# Altium PCB CDH.PcbDoc
Units mil, origin at the board's own origin, x right, y up, seen from the top; angles counter-clockwise.
Board outline 3145 x 3115 mil, 2 copper layers (Top Layer, Bottom Layer); 28 components, 26 nets, 131 pads, 2 vias.
Unrouted connection lines stored in the file: 69.
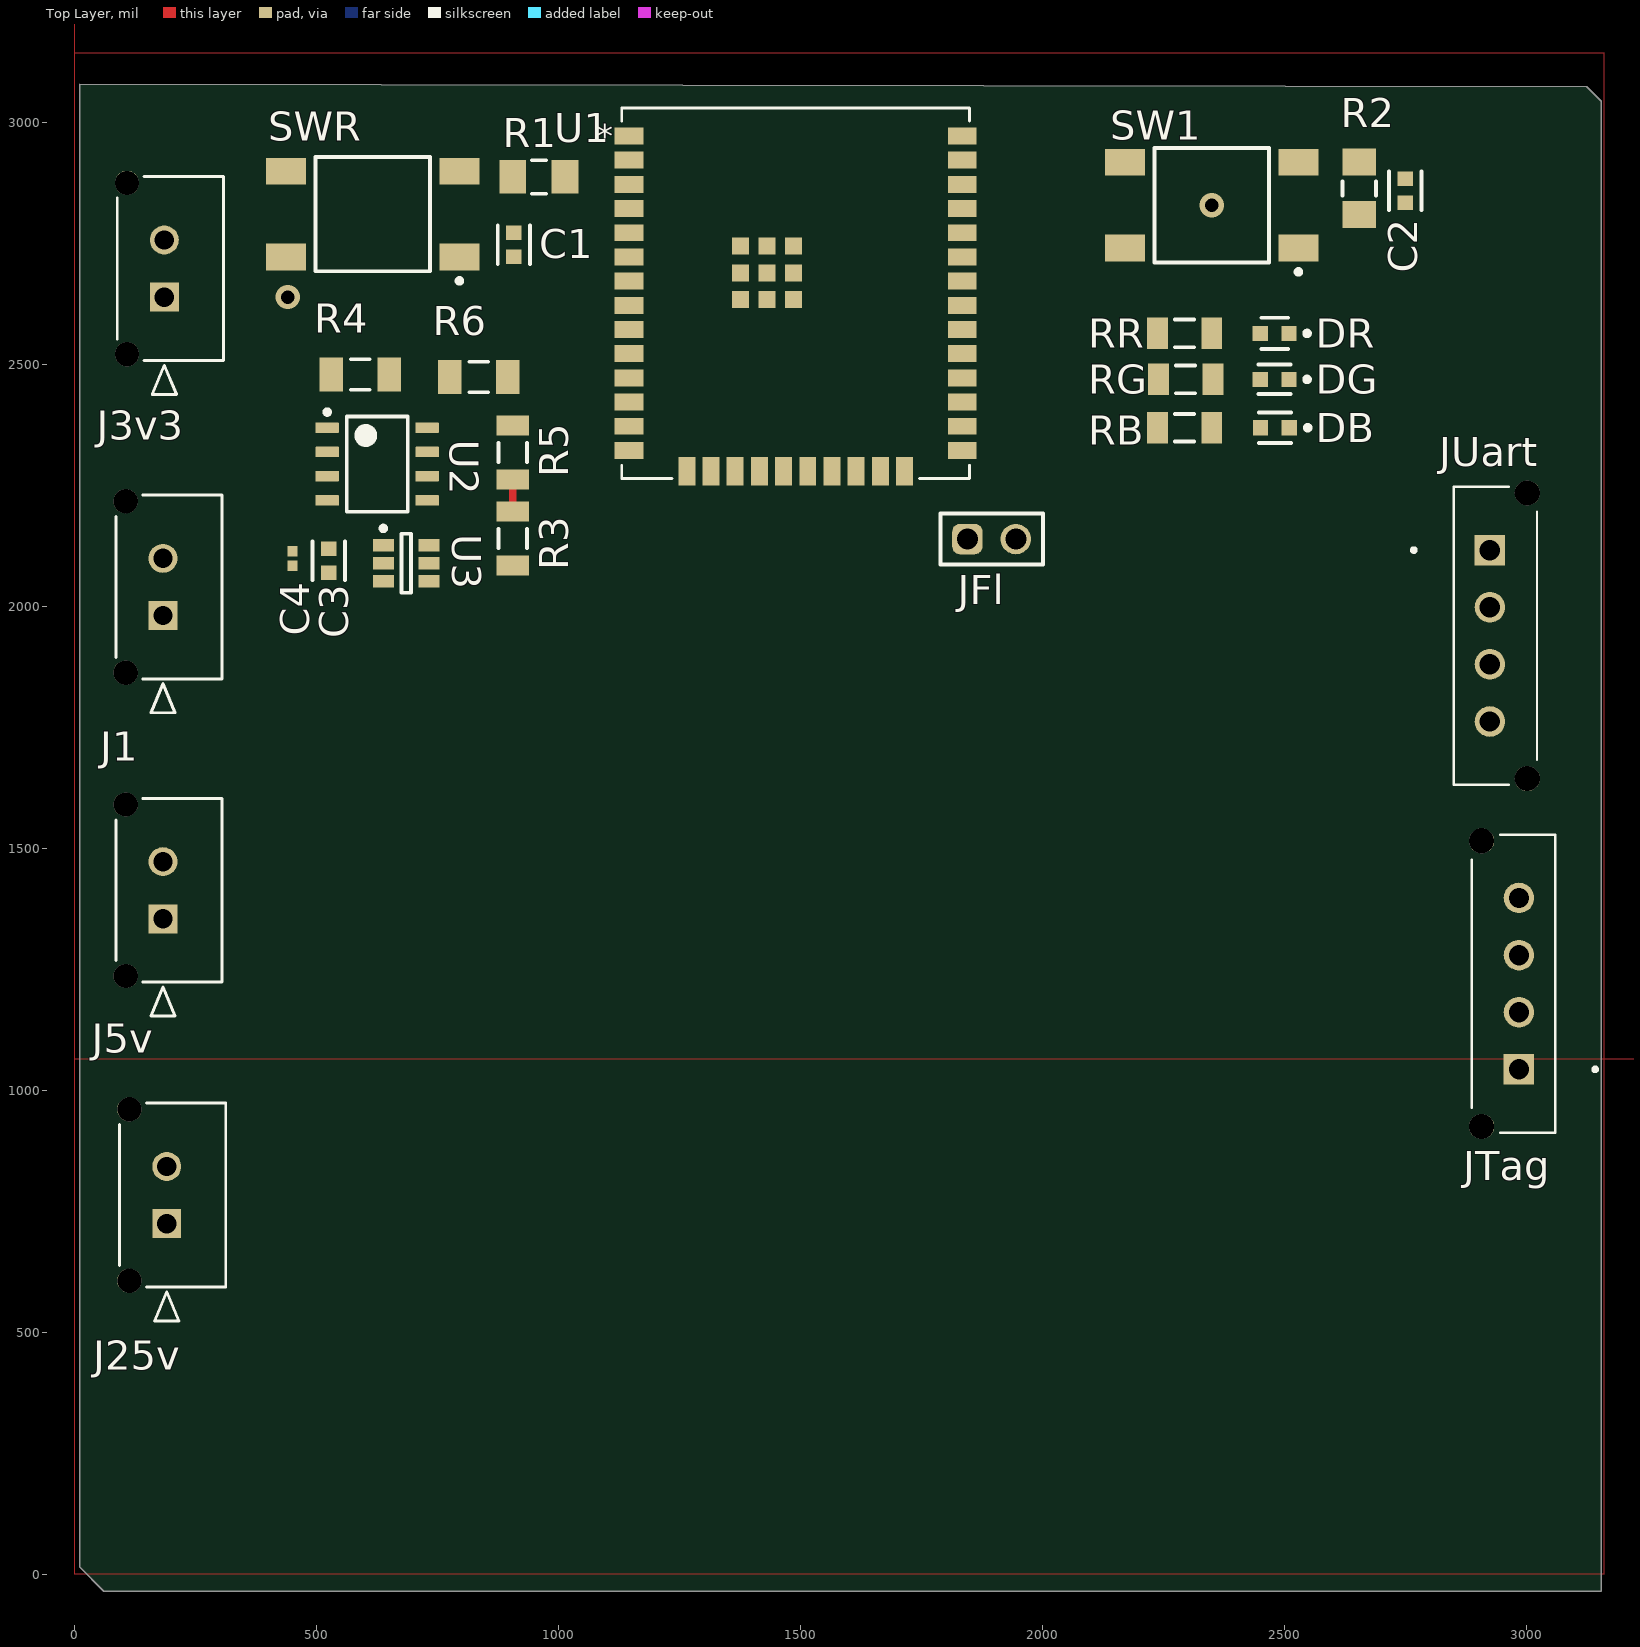
[diagram p0: Top Layer view]
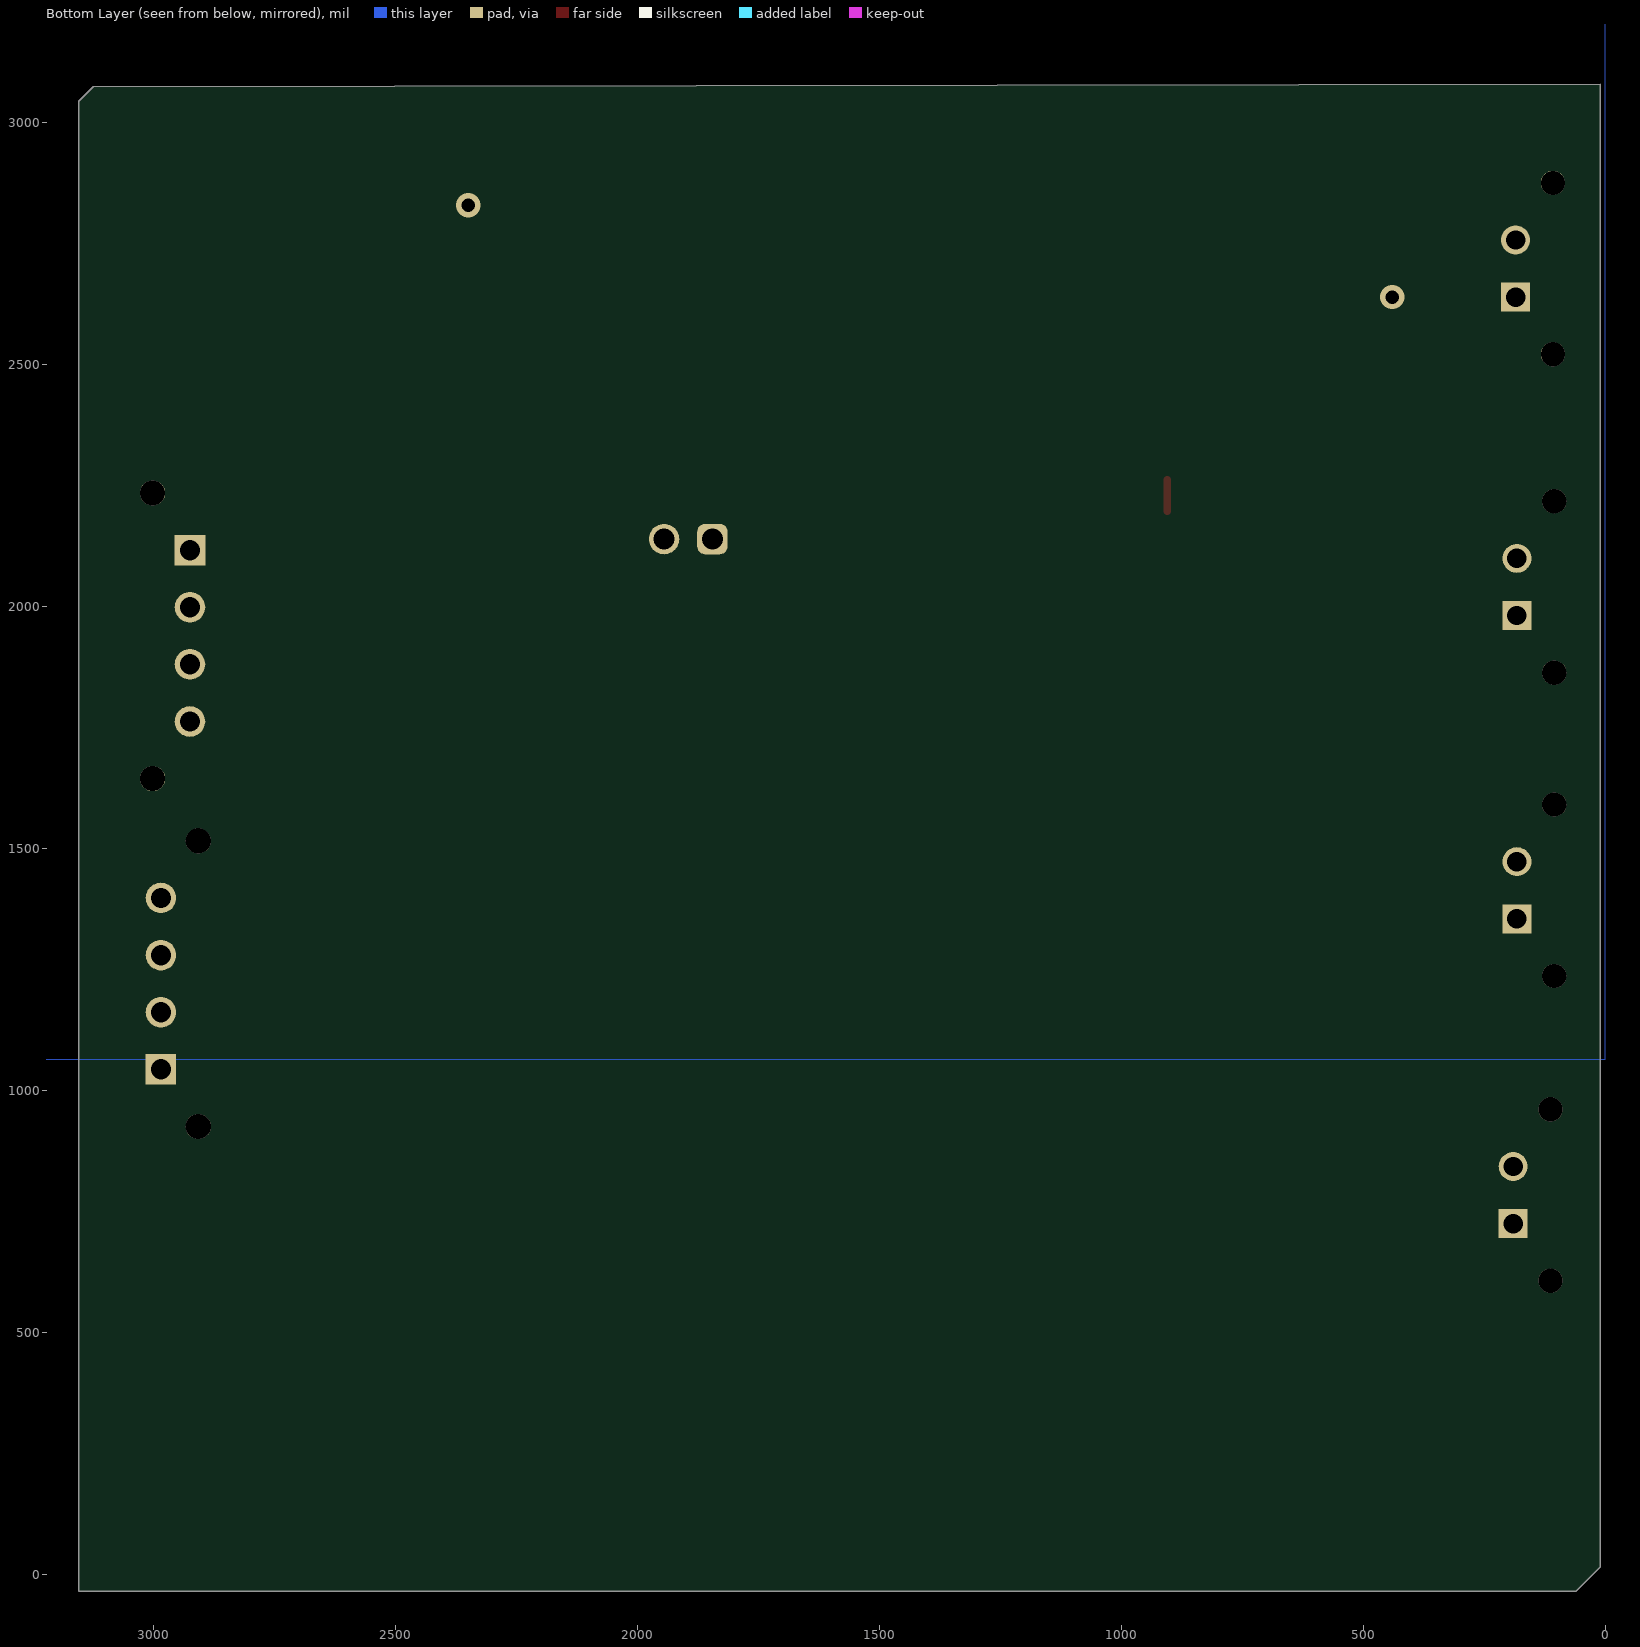
[diagram p1: Bottom Layer view, seen from below]

## Layer stack, top to bottom
Top Solder: solder mask 0.4, Solder Resist, Dk 3.5
Top Layer: signal copper 1.4
Dielectric 1: dielectric 12.6, FR-4, Dk 4.8
Bottom Layer: signal copper 1.4
Bottom Solder: solder mask 0.4, Solder Resist, Dk 3.5

## Board outline
10,3080 10,15 60,-35 3155,-35 3155,3045 3125,3075

## Design rules (kind name [scope] priority, off if disabled: settings)
BoardOutlineClearance [All] p1: gap=7.87 ignorepadtopadclearanceinfootprint=FALSE except(15.75: Arc-SplitBarrior Arc-SplitContinuation Track-SplitBarrior Track-SplitContinuation SMDPad-SplitBarrior SMDPad-SplitContinuation THPad-SplitBarrior THPad-SplitContinuation Via-SplitBarrior Via-SplitContinuation Fill-SplitBarrior Fill-SplitContinuation Poly-SplitBarrior Poly-SplitContinuation Region-SplitBarrior Region-SplitContinuation Text-SplitBarrior Text-SplitContinuation)
Clearance "Clearance Bottom Layer" [OnLayer('Bottom Layer')] p1: gap=8 ignorepadtopadclearanceinfootprint=TRUE except(10: Arc-Text Track-Text SMDPad-Text THPad-Text Via-Text Fill-Text Poly-Text Region-Text Text-Text)
Clearance "Clearance Top Layer" [OnLayer('Top Layer')] p2: gap=8 ignorepadtopadclearanceinfootprint=TRUE except(10: Arc-Text Track-Text SMDPad-Text THPad-Text Via-Text Fill-Text Poly-Text Region-Text Text-Text)
Clearance [All] p3: gap=7.87 ignorepadtopadclearanceinfootprint=FALSE except(3.5: Arc-Arc Arc-Track Arc-SMDPad Track-Track Track-SMDPad SMDPad-SMDPad; 5: Arc-Via Track-Via SMDPad-Via THPad-Via Via-Via; 10: Arc-Text Track-Text SMDPad-Text THPad-Text Via-Text Fill-Text Poly-Text Region-Text Text-Text)
HoleSize [All] p1: absolutevalues=TRUE maxlimit=248.03 minlimit=7.87 maxpercent=80.000 minpercent=20.000
MinimumAnnularRing [All] p1: minimumring=3
MinimumSolderMaskSliver [All] p1: minsoldermaskwidth=3.94
PolygonConnect PolygonConnect_1 [All] p1: thpad.connectstyle=Relief thpad.reliefconductorwidth=20 thpad.reliefentries=4 thpad.polygonreliefangle="90 Angle" thpad.airgapwidth=10 smdpad.connectstyle=Relief smdpad.reliefconductorwidth=20 smdpad.reliefentries=4 smdpad.polygonreliefangle="90 Angle" smdpad.airgapwidth=10 via.connectstyle=Direct via.reliefconductorwidth=20 via.reliefentries=4 via.polygonreliefangle="90 Angle" via.airgapwidth=10
RoomDefinition MAPLE_CDH_Periph [InComponentClass('MAPLE_CDH_Periph')] p1: confinementstyle=ConfineIn formatcopy=TRUE lockcomponents=FALSE outline -325,-1855 1675,-1855 1675,-855 -325,-855
RoomDefinition MAPLE_CDH_Cntrlr [InComponentClass('MAPLE_CDH_Cntrlr')] p2: confinementstyle=ConfineIn formatcopy=TRUE lockcomponents=FALSE outline -325,-1855 1675,-1855 1675,-855 -325,-855
RoutingCorners [All] p1: cornerstyle=Round minsetback=100 maxsetback=100
RoutingVias [All] p1: holewidth=19.68 width=39.37 viastyle="Through Hole" minholewidth=7.87 minwidth=17.72 maxholewidth=39.37 maxwidth=78.74
SilkToSilkClearance [All] p1: silktosilkclearance=3.94
SilkToSolderMaskClearance [IsPad] p1: minsilkscreentomaskgap=3.94 clearancetoexposedcopper=TRUE
SolderMaskExpansion [All] p1: expansion=4 istentingtop=FALSE
Width [All] p1: maxlimit=100 minlimit=3.5 preferedwidth=15
25 further rules are at their usual default settings.

## Classes and differential pairs
component class MAPLE_CDH_Cntrlr: U1

## Components (designator, comment, footprint, x,y, rotation, side; value= is the part's Value field where it differs from the comment)
C1 "CL10A105KA8NNNC" FP-CL10-IPC_C 907.67,2748.39 r90 top
C2 "CL10A105KA8NNNC" FP-CL10-IPC_C 2750,2860 r90 top
C3 "CL10A105KA8NNNC" FP-CL10-IPC_C 525,2095 r270 top
C4 "CL03A104KQ3NNNC" CAPC0603X33X15ML03T05 450,2100 r90 top
DB "LTST-C193TBKT-5A" FP-LTST-C193TBKT-5A-MFG 2480.47,2370 r180 top
DG "LTST-C193KGKT-5A" FP-LTST-C193KGKT-5A-MFG 2480,2470 r180 top
DR "LTST-C193KRKT-5A" FP-LTST-C193KRKT-5A-MFG 2480,2565 r180 top
J1 "436500227" CON_436500227_MOL 182.26,1981.89 r270 top
J3v3 "436500227" CON_436500227_MOL 185,2640 r270 top
J5v "436500227" CON_436500227_MOL 182.26,1355 r270 top
J25v "436500227" CON_436500227_MOL 190,725 r270 top
JFl "61300211121" 61300211121 1895,2140 r0 top
JTag "0436500415" MOLEX_0436500415 2985,1220.94 r270 top
JUart "0436500415" MOLEX_0436500415 2925,1940 r90 top
R1 "RMCF1206FT10K0" FP-RMCF1206-IPC_B 959.16,2888.49 r180 top
R2 "RMCF1206FT10K0" FP-RMCF1206-IPC_B 2655,2865 r90 top
R3 "" RESC3116X65X40NL10T20 905,2141.1 r90 top
R4 "" RESC3116X65X40ML10T20 589.96,2480 r180 top
R5 "RC1206FR-0724K9L" RESC3116X65X40NL10T20 905,2318.9 r270 top
R6 "RC1206FR-07100KL" RESC3116X65X40ML10T20 835,2475 r0 top
RB "ERJ-8ENF1000V" RESC3216X70X50NL05T20 2293.9,2370 r0 top
RG "ERJ-8GEYJ271V" RESC3216X70X50NL05T20 2296.1,2470 r0 top
RR "ERJ-8GEYJ271V" RESC3216X70X50NL05T20 2293.9,2565 r0 top
SW1 "FSM4JSMA" TECO-FSM4JSMA_V 2350,2830 r270 top
SWR "FSM4JSMA" TECO-FSM4JSMA_V 615.87,2811.42 r270 top
U1 "ESP32-WROOM-32UE-N16" ESP32-32UE_EXP 1490,2648.11 r0 top
U2 "THS4505DR" D0008A_L 625,2295 r0 top
U3 "ADC121C027CIMK" MK06A_N 685,2090 r0 top

## Footprints (in the part's own frame and the unit in brackets; to place one, negate y for a bottom-side part, rotate by r counter-clockwise, add the part's x,y. Pads: shape width x height; smd on the part's side, far side on the other; paste and mask are expansions set on the pad)
61300211121 [mm] "Pin Header, pitch 2.54 mm, THT, Vertical, single row, 2p"
  rrect50% 1.6x1.6 hole 1.1: 1(-1.27,0)
  round 1.6 hole 1.1: 2(1.27,0)
  silkscreen extent -2.69,-1.35 2.69,1.35, body extent -2.54,-1.27 2.54,1.27, height 8.57
CAPC0603X33X15ML03T05 [mm] "Chip Capacitor, 2-Leads, Body 0.60x0.30mm, IPC Low Density"
  rect 0.56x0.52 smd: 1(-0.38,0) 2(0.38,0)
  body extent -0.31,-0.17 0.32,0.16, height 0.33
CON_436500227_MOL [mm]
  rect 1.52x1.52 / inner round 1.524 / far side rect 1.52x1.52 hole 1.02 paste-0.76 mask+0.076: 1(0,0)
  round 1.52 / inner round 1.524 / far side round 1.52 hole 1.02 paste-0.76 mask+0.076: 2(-3,0)
  round 1.27 / inner round 1.524 / far side round 1.27 hole 1.27 unplated paste-0.635 mask+0.076: M1(3,-1.96) M2(-6,-1.96)
  silkscreen extent -6.32,-2.47 5.1,3.1
D0008A_L [mm] "SOIC, 8-Leads, Body 5x4mm, Pitch 1.27mm, IPC High Density"
  rrect18% 1.25x0.55 smd: 1(-2.625,1.905) 2(-2.625,0.635) 3(-2.625,-0.635) 4(-2.625,-1.905) 5(2.625,-1.905) 6(2.625,-0.635) 7(2.625,0.635) 8(2.625,1.905)
  silkscreen extent -2.75,-2.5 1.6,2.85, body extent -3,-2.45 3,2.45, height 1.63
ESP32-32UE_EXP [mil]
  rect 59x35 smd paste+0 mask+0: 1(-344.49,325) 2(-344.49,275) 3(-344.49,225) 4(-344.49,175) 5(-344.49,125) 6(-344.49,75) 7(-344.49,25) 8(-344.49,-25) 9(-344.49,-75) 10(-344.49,-125) 11(-344.49,-175) 12(-344.49,-225) 13(-344.49,-275) 14(-344.49,-325) 25(344.49,-325) 26(344.49,-275) 27(344.49,-225) 28(344.49,-175) 29(344.49,-125) 30(344.49,-75) 31(344.49,-25) 32(344.49,25) 33(344.49,75) 34(344.49,125) 35(344.49,175) 36(344.49,225) 37(344.49,275) 38(344.49,325)
  rect 35x59 smd paste+0 mask+0: 15(-225,-368.11) 16(-175,-368.11) 17(-125,-368.11) 18(-75,-368.11) 19(-25,-368.11) 20(25,-368.11) 21(75,-368.11) 22(125,-368.11) 23(175,-368.11) 24(225,-368.11)
  rect 35x35 smd paste-17.5 mask-17.5: 39(-59.22,42.08) 40(-114.34,97.2) 41(-114.34,42.08) 42(-114.34,-13.04) 43(-59.22,-13.04) 44(-59.22,97.2) 45(-4.11,97.2) 46(-4.11,42.08) 47(-4.11,-13.04)
  silkscreen extent -360,-383 360,383
FP-CL10-IPC_C [mil]
  rect 29.85x31.97 smd paste+0 mask+0: 1(-24.68,0) 2(24.68,0)
  silkscreen extent -40,-33 40,33, body extent -44,-22 44,22, height 10
FP-LTST-C193KGKT-5A-MFG [mm]
  rect 0.8x0.8 smd paste+0 mask+0: 1(-0.75,0) 2(0.75,0)
  silkscreen extent -1.83,-0.77 0.85,0.77, body extent -1.25,-0.55 1.25,0.55, height 0.25
FP-LTST-C193KRKT-5A-MFG [mm]
  rect 0.8x0.8 smd paste+0 mask+0: 1(-0.75,0) 2(0.75,0)
  silkscreen extent -1.83,-0.82 0.7,0.82, body extent -1.25,-0.55 1.25,0.55, height 0.25
FP-LTST-C193TBKT-5A-MFG [mm]
  rect 0.8x0.8 smd paste+0 mask+0: 1(-0.75,0) 2(0.75,0)
  silkscreen extent -1.85,-0.8 0.85,0.8, body extent -1.25,-0.55 1.25,0.55, height 0.25
FP-RMCF1206-IPC_B [mil]
  rect 55.27x69.22 smd paste+0 mask+0: 1(-54.16,0) 2(54.16,0)
  silkscreen extent -15,-35 15,35, body extent -92,-44 92,44, height 10
MK06A_N [mm] "SOT23, 6-Leads, Body 3.0x1.7mm, Pitch 0.95mm, Lead Span 2.9mm, IPC Medium Density"
  rect 1.1x0.65 smd: 1(-1.2,0.95) 2(-1.2,0) 3(-1.2,-0.95) 4(1.2,-0.95) 5(1.2,0) 6(1.2,0.95)
  silkscreen extent -1.32,-1.55 0.25,1.95, body extent -0.87,-1.53 0.87,1.54, height 1
MOLEX_0436500415 [mm]
  rect 1.605x1.605 hole 1.07: 1(4.5,0)
  round 1.605 hole 1.07: 2(1.5,0) 3(-1.5,0) 4(-4.5,0)
  round 1.32 hole 1.32 unplated: ""(-7.5,-1.96) ""(7.5,-1.96)
  silkscreen extent -7.83,-2.47 7.83,4.1
RESC3116X65X40ML10T20 [mm] "Chip Resistor, 2-Leads, Body 3.10x1.60mm, IPC Low Density"
  rect 1.25x1.8 smd: 1(-1.525,0) 2(1.525,0)
  silkscreen extent -0.5,-0.8 0.5,0.8, body extent -1.6,-0.85 1.6,0.85, height 0.65
RESC3116X65X40NL10T20 [mm] "Chip Resistor, 2-Leads, Body 3.10x1.60mm, IPC Medium Density"
  rect 1.05x1.7 smd: 1(-1.425,0) 2(1.425,0)
  silkscreen extent -0.5,-0.75 0.5,0.75, body extent -1.6,-0.85 1.6,0.85, height 0.65
RESC3216X70X50NL05T20 [mm] "Chip Resistor, 2-Leads, Body 3.20x1.60mm, IPC Medium Density"
  rect 1.1x1.65 smd: 1(-1.425,0) 2(1.425,0)
  silkscreen extent -0.5,-0.72 0.5,0.72, body extent -1.63,-0.82 1.62,0.82, height 0.7
TECO-FSM4JSMA_V [mm] "SMD, 4-Leads, Body 6x6mm, Pitch 4.5mm"
  rect 1.4x2.1 smd: 1(2.25,4.55) 2(2.25,-4.55) 3(-2.25,4.55) 4(-2.25,-4.55)
  silkscreen extent -3,-3 3.62,4.68, body extent -3,-5 3,5, height 5.08

## Part data
C1 C2 C3: library part CMP-13271-004127-1, "Cap Ceramic 1uF 25V X5R ±10% Pad SMD 0603 +85°C T/R", Capacitance=1uF, Case Code (Imperial)=0603, Case Code (Metric)=1608, Dielectric=X5R, Max Operating Temperature=85°C, Min Operating Temperature=-55°C, Package Quantity=1, Tolerance=10%, Voltage=25V, Case/Package=0603, Contact Plating=Tin, Depth=0.8mm, Height=0.8mm, Lead Free="Lead Free", Length=1.6mm, Material=Ceramic, Mount="Surface Mount", Packaging="Tape and Reel", Radiation Hardening=No, Thickness=0.035inch, Voltage Rating=25V, Voltage Rating (DC)=25V, Width=0.031inch
C4: library part CMP-2010-00674-1, Manufacturer=Samsung, Part Number=CL03A104KQ3NNNC
DB: library part CMP-2000-06624-2, "LED BLUE CLEAR CHIP SMD", Case Code (Imperial)=0603, Case Code (Metric)=1608, Color=Blue, Forward Current=20mA, Forward Voltage=2.8V, Lens Color=Colorless, Max Operating Temperature=80°C, Min Operating Temperature=-20°C, Package Quantity=1, Power Dissipation=76mW, Reverse Voltage=5V, Test Current=5mA, Case/Package=0603, Depth=0.8mm, Dominant Wavelength=475nm, Height=0.35mm, Illumination Color=Blue, Lead Free="Lead Free", Length=1.6mm, Lens Style=Diffused, Lens Transparency=Clear, Luminous Intensity=15mcd, Mount="Surface Mount", Number of Elements=1, Number of LEDs=1, Number of Pins=2, Packaging="Tape and Reel", Radiation Hardening=No, RoHS Compliant=Yes, Viewing Angle=130°, Width=0.8mm
DG: library part CMP-2000-06622-2, "LED GREEN CLEAR CHIP SMD", Case Code (Imperial)=0603, Case Code (Metric)=1608, Color=Green, Forward Current=30mA, Forward Voltage=2.3V, Lens Color=Colorless, Max Operating Temperature=85°C, Min Operating Temperature=-55°C, Package Quantity=3000, Power Dissipation=75mW, Reverse Voltage=5V, Test Current=5mA, Case/Package=0603, Depth=0.8mm, Dominant Wavelength=576.5nm, Height=0.35mm, Illumination Color=Green, Lead Free="Lead Free", Length=1.6mm, Lens Style=Diffused, Lens Transparency=Clear, Luminous Intensity=28mcd, Mount="Surface Mount", Number of Elements=1, Number of LEDs=1, Number of Pins=2, Packaging="Tape and Reel", Power Rating=75mW, Radiation Hardening=No, Viewing Angle=130°, Width=0.8mm
DR: library part CMP-2000-06623-2, "LED RED CLEAR CHIP SMD", Case Code (Imperial)=0603, Case Code (Metric)=1608, Color=Red, Forward Current=5mA, Forward Voltage=2.3V, Lens Color=Colorless, Max Operating Temperature=85°C, Min Operating Temperature=-55°C, Package Quantity=3000, Power Dissipation=50mW, Reverse Voltage=5V, Case/Package=0603, Depth=0.8mm, Dominant Wavelength=631nm, Height=0.35mm, Illumination Color=Red, Lead Free="Lead Free", Length=1.6mm, Lens Style=Diffused, Lens Transparency=Clear, Luminous Intensity=45mcd, Mount="Surface Mount", Number of Elements=1, Number of LEDs=1, Number of Pins=2, Packaging="Tape and Reel", Radiation Hardening=No, Test Current=5mA, Viewing Angle=130°, Width=0.8mm
J1 J3v3 J5v J25v: "No Description Available", Mfr_Name="Molex Connector Corporation", Copyright="Copyright (C) 2023 Ultra Librarian. All rights reserved.", Digi-Key_Part_Number_1=WM10656-ND, Manufacturer_Part_Number=436500227, RefDes=RefDes, Type=DEV
JFl: library part CMP-1712-00002-5, Color=Black, Contact Resistance=20mΩ, Current Rating=3A, Max Operating Temperature=125°C, Min Operating Temperature=-40°C, Operating Supply Voltage=250V, Connector Type="Male Pin", Contact Gender=Male, Contact Material=Copper, Contact Mating Length=5.9944mm, Contact Plating=Gold, Gender=Male, Height=8.94mm, Housing Material=PBT, Lead Free="Lead Free", Lead Pitch=2.54mm, Mount="Through Hole", NexarPartId=20081794, Number Of Contacts=2, Number of Pins=2, Number of Positions=2, Number Of Rows=1, Orientation=Vertical, Packaging=Bulk, Pitch=2.54mm, REACH SVHC="No SVHC", RoHS=Compliant, Termination="Through Hole", Voltage Rating=250V
JTag JUart: "Connector Header Through Hole 4 position 0.118 (3.00mm)", Package=None, Availability=Unavailable, MF=Molex, MP=0436500415, Price=None, SnapEDA_Link=https://www.snapeda.com/parts/0436500415/Molex/view-part/425083/?ref=snap
R1 R2: library part CMP-26527-000151-1, "10kΩ ±1% 0.25W 1206 Thick Film Chip Resistor AEC-Q200 compliant", Case Code (Imperial)=1206, Case Code (Metric)=3216, Max Operating Temperature=155°C, Max Power Dissipation=250mW, Min Operating Temperature=-55°C, Resistance=10kR, Resistor Type="Thick Film", Temperature Coefficient=100ppm/°C, Tolerance=1%, Case/Package=1206, Construction=Rectangular, Contact Plating=Tin, Depth=1.6mm, Features="Automotive AEC-Q200", Height=0.028inch, Lead Free="Lead Free", Length=3.2mm, Military Standard=Not, Mount="Surface Mount", Number of Terminations=2, Packaging="Tape and Reel", Power Rating=250mW, Radiation Hardening=No, RoHS Compliant=Yes, Series=RMCF, Size Code=1206, Width=0.063inch
R3: library part CMP-2003-03636-1, Manufacturer=Yageo, Part Number=RC1206FR-0724K9L
R4 R6: library part CMP-2100-03674-1, "Chip Resistor, 100 KOhm, +/- 1%, 0.25 W, -55 to 155 degC, 1206 (3216 Metric), RoHS, Tape and Reel", Case Code (Imperial)=1206, Case Code (Metric)=3216, Manufacturer=Yageo, Max Operating Temperature=155degC, Min Operating Temperature=-55degC, Package Description="2-Pin Surface Mount Device, Body 3.1 x 1.6 mm", Package Reference=1206.0, Power Rating=250mW, Resistance=100KOhm, Temperature Coefficient=100ppm/degreesC, Tolerance=1%, Voltage Rating=200V, Case/Package=1206, Composition=ThickFilm, Datasheet URL=http://www.yageo.com/NewPortal/yageodocoutput?fileName=/pdf/R-Chip/PYu-RC_Group_51_RoHS_L_5.pdf, Datasheet Version="Rev. 5, 10/2016", Depth=1.6mm, Height=0.55mm, Lead Free=LeadFree, Length=3.1mm, Manufacturer URL=http://www.yageo.com/, Packaging=TapeandReel, REACH SVHC=NoSVHC, RoHSCompliant=true, Termination=SMD/SMT
R5: library part CMP-2003-03636-1, Manufacturer=Yageo, Part Number=RC1206FR-0724K9L
RB: library part CMP-2003-00016-1, Manufacturer=Panasonic, Part Number=ERJ-8ENF1000V
RG RR: library part CMP-2003-00597-1, Manufacturer=Panasonic, Part Number=ERJ-8GEYJ271V
SW1 SWR: library part CMP-2000-05602-2, "Swicth, SPST, 24 V, -35 to 85 degC, 4-Pin SMD, RoHS, Tape and Reel", Case\/Package=SMD/SMT, Contact Current Rating=50mA, Contact Resistance=100mOhm, Manufacturer="TE Connectivity", Max Operating Temperature=85degC, Max Voltage Rating (DC)=12V, Min Operating Temperature=-35degC, Operating Force=1.57N, Package Description="4-Pin Surface Mount Device, Body 6 x 6 mm, Pitch 4.5 mm", Package Quantity=750, Voltage Rating=24V, Actuator Length=0.055inch, Actuator Material=Polyamide, Contact Material=CopperAlloy, Contact Plating=Silver, Current Rating=50mA, Datasheet URL=http://www.te.com/commerce/DocumentDelivery/DDEController?Action=showdoc&DocId=Customer+Drawing%7F2-1437565-7%7FV%7Fpdf%7FEnglish%7FENG_CD_2-1437565-7_V.pdf%7F4-1437565-2, Datasheet Version="Rev. V, 02/2015", Electrical Life=100000Cycles, Illumination Type=Illuminated, Length=6mm, Manufacturer URL=http://www.te.com/, Mechanical Life=100000Cycles, Mount=SurfaceMount, Mounting Technology=SurfaceMount, Orientation=Straight, Package Reference=FSM4JSMA, Packaging=LoosePiece, REACH SVHC=Unknown, RoHSCompliant=true, Switch Travel=0.25mm, Termination=GullWing, Throw Configuration=SPST, Voltage Rating (DC)=24V, Width=6mm
U1: "No Description Available", Mfr_Name="Espressif Systems", Copyright="Copyright (C) 2023 Ultra Librarian. All rights reserved.", Manufacturer_Part_Number=ESP32-WROOM-32UE-N16, RefDes=RefDes, Type=DEV
U2: library part CMP-0811-00031-2, "Wideband, Low-Distortion Fully Differential Amplifier, 4.5 to 15 V, -40 to 85 degC, 8-pin SOIC (D8), Green (RoHS & no Sb/Br)", Manufacturer="Texas Instruments", Offset Voltage Drift (+/-)(Max)(uV/Degrees Celsius=10, 2nd Harmonic(dBc)=66, 3rd Harmonic(dBc)=65, @ MHz=30, BW @ Acl(MHz)=260, Code_JEDEC=MS-012, ComponentLink1Description="Manufacturer URL", ComponentLink1URL=http://www.ti.com/, ComponentLink2Description=Datasheet, ComponentLink2URL=http://www.ti.com/general/docs/lit/getliterature.tsp?genericPartNumber=THS4505&fileType=pdf, ComponentLink3Description="Package Specification", ComponentLink3URL=http://www.ti.com/litv/pdf/msoi002j, DatasheetVersion=SLOS363D, Eco-Plan="Green (RoHS & no Sb/Br)", Io(Typ)(mA)=100, Iq per channel(Max)(mA)=21, Mounting Technology="Surface Mount", Number of Channels=1, PackageDescription="8-Pin Plastic Small Outline, Body 4.9 x 3.9 mm, Pitch 1.27 mm", PackageReference=D0008A, PackageVersion="4040047-3/M, 06/2011", PartNumber=THS4505DR, Settling Time (0.1%)(Typ)(ns)=20, Slew Rate(Typ)(V/us)=1800, SubFamily="Fully Differential Amplifier", THD (Fc is 1 MHz)(Typ)(dB)=-78, Vio(Max)(mV)=-7, Vn at Flatband(Typ)(nV/rtHz)=8, Vs(Max)(V)=15, Vs(Min)(V)=4.5
U3: library part CMP-0054-00264-2, "I2C-Compatible, 12-Bit Analog-to-Digital Converter with Alert Function, 6-pin Tiny SOT23", Manufacturer="National Semiconductor", PackageTopMarking=X31C*XTT, PowerWise=Y, Code_IPC=SOT26A-6, Code_JEDEC=MO-193-AA, ComponentLink1Description="ADC121C027 Datasheet", ComponentLink1URL=http://www.national.com/ds/AD/ADC121C027.pdf, ComponentLink2Description="ADC121C027 Web Page", ComponentLink2URL=http://www.national.com/pf/AD/ADC121C027.html, ComponentLink3Description="MK06A Package Page", ComponentLink3URL=http://www.national.com/packaging/folders/mk06a.html, CompType="ADC IC", DatasheetVersion=Apr-2009, PackageDescription="Molded TSOT, 2.97 x 1.65 x 0.87mm Body, 6 Lead, 0.95mm Pitch", PackageReference=MK06A, PackageVersion="revE, Nov-2008", PinCount=6, RevisionNote="Component URLs added", RoHS=N

## Via types
v1: diameter 50, hole 28, Top Layer to Bottom Layer, 2 vias

## Nets (pads, with @x,y where several pads share a name; then routed paths per layer and width w, separated by ;. In a path a pad name is that pad's centre, name@x,y a point inside that pad or via, vN(x,y) a via of type N, cw(c..) or ccw(c..) an arc to the next point about the centre after c; other vN are vias at no path point)
GND: C1.1 C3.2 C4.1 DB.1 DG.1 DR.1 J1.2 J3v3.2 J5v.2 J25v.2 JFl.2 JUart.1 R2.1 R4.1 R6.1 SWR.1 U1.1 U1.15 U1.38 U1.39 U1.40 U1.41 U1.42 U1.43 U1.44 U1.45 U1.46 U1.47 U2.6 U3.2
NetC1_2: C1.2 R1.2 SWR.3 U1.3
NetC2_1: C2.1 J3v3.1 JUart.4 R1.1 SW1.1 U1.2
  other v1: 440,2640 2350,2830
NetC2_2: C2.2 R2.2 SW1.3
NetC3_1: C3.1 C4.2 J5v.1 U2.3 U3.1
NetDB_2: DB.2 RB.2
NetDG_2: DG.2 RG.2
NetDR_2: DR.2 RR.2
NetJ1_1: J1.1 R3.1 R4.2 U2.1
NetJ25v_1: J25v.1 R3.2 R5.2 | length 65.6
  Top Layer w15: R3.2 R5.2
NetJFl_1: JFl.1 U1.25
NetJTag_1: JTag.1 U1.13
NetJTag_2: JTag.2 U1.14
NetJTag_3: JTag.3 U1.16
NetJTag_4: JTag.4 U1.23
NetJUart_2: JUart.2 U1.35
NetJUart_3: JUart.3 U1.34
NetR5_1: R5.1 R6.2 U2.8
NetRB_1: RB.1 U1.30
NetRG_1: RG.1 U1.31
NetRR_1: RR.1 U1.33
NetSW1_4: SW1.4 U1.37
NetU1_10: U1.10 U3.6
NetU1_11: U1.11 U3.5
NetU1_12: U1.12 U3.4
NetU2_4: U2.4 U3.3
pads on no net: J1.M1 J1.M2 J3v3.M1 J3v3.M2 J5v.M1 J5v.M2 J25v.M1 J25v.M2 JTag. JUart. SW1.2 SWR.2 SWR.4 U1.4 U1.5 U1.6 U1.7 U1.8 U1.9 U1.17 U1.18 U1.19 U1.20 U1.21 U1.22 U1.24 U1.26 U1.27 U1.28 U1.29 U1.32 U1.36 U2.2 U2.5 U2.7

## Polygon pours and split planes (outlines as drawn)
no net on Top Layer "Default Coverlay 1 Top" (split plane): 0,5000 3935,5000 3935,1065 0,1065
no net on Top Layer "Default Coverlay 1 Bottom" (split plane): 0,5000 3935,5000 3935,1065 0,1065
GND on Bottom Layer "NONET_L02_P001" (solid, shelved, pour order 1): 0,5000 3935,5000 3935,1065 0,1065
no net on Top Layer "NONET_L01_P004" (solid, shelved, pour order 4): 0,3145 3160,3145 3160,0 0,0
GND on Top Layer "NONET_L01_P003" (solid, shelved, pour order 3): 0,5000 3935,5000 3935,1065 0,1065

## Text inside footprints (layer, text, board x,y; h text height)
JTag: Top 3D Body "PCB THICKNESS: 0.062in/1.57mm" at 3070,1461.5 h24 r270
JUart: Top 3D Body "PCB THICKNESS: 0.062in/1.57mm" at 2840,1699.45 h24 r90
U1: Top 3D Body "*" at 1187.51,2948.11 h50; Top Overlay "*" at 1078.51,2948.11 h50